# EAGLE board uc_relais_battery_devel_rev_a_4.3.2014 (EAGLE 6.5.0), part 1 of 2
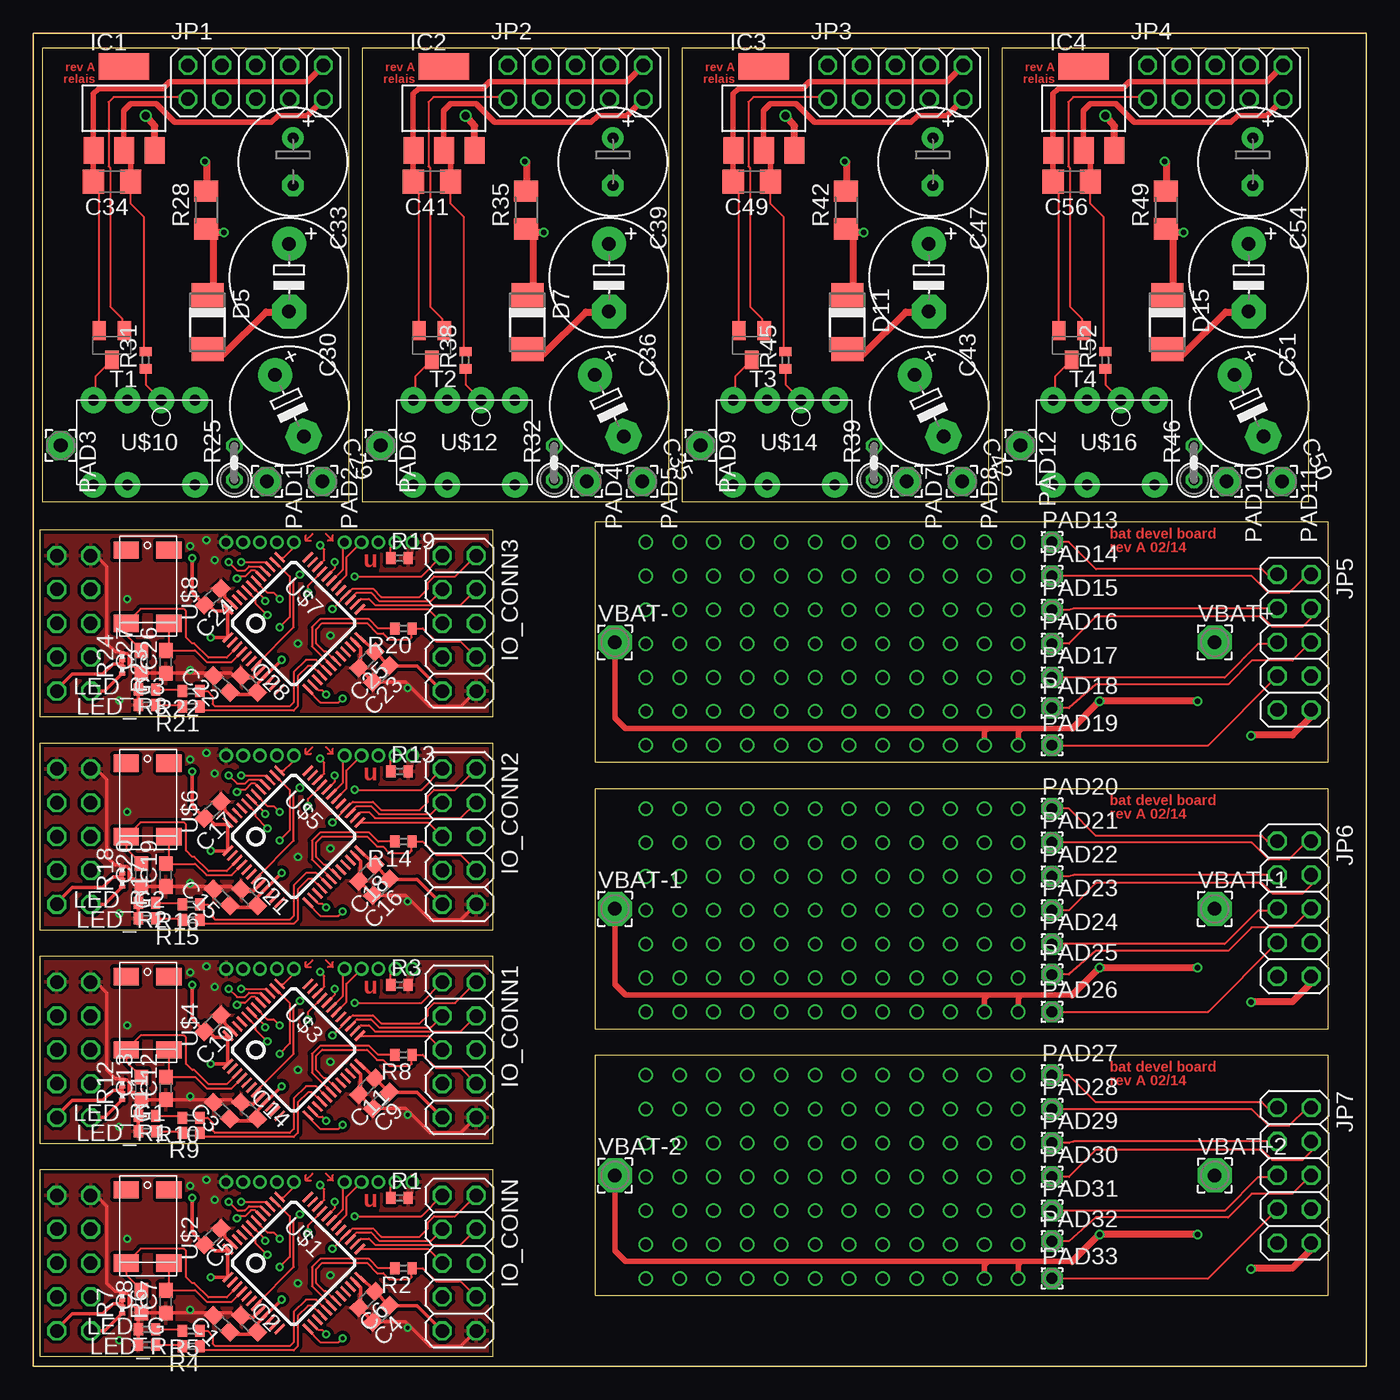
[diagram p0: board, top side]
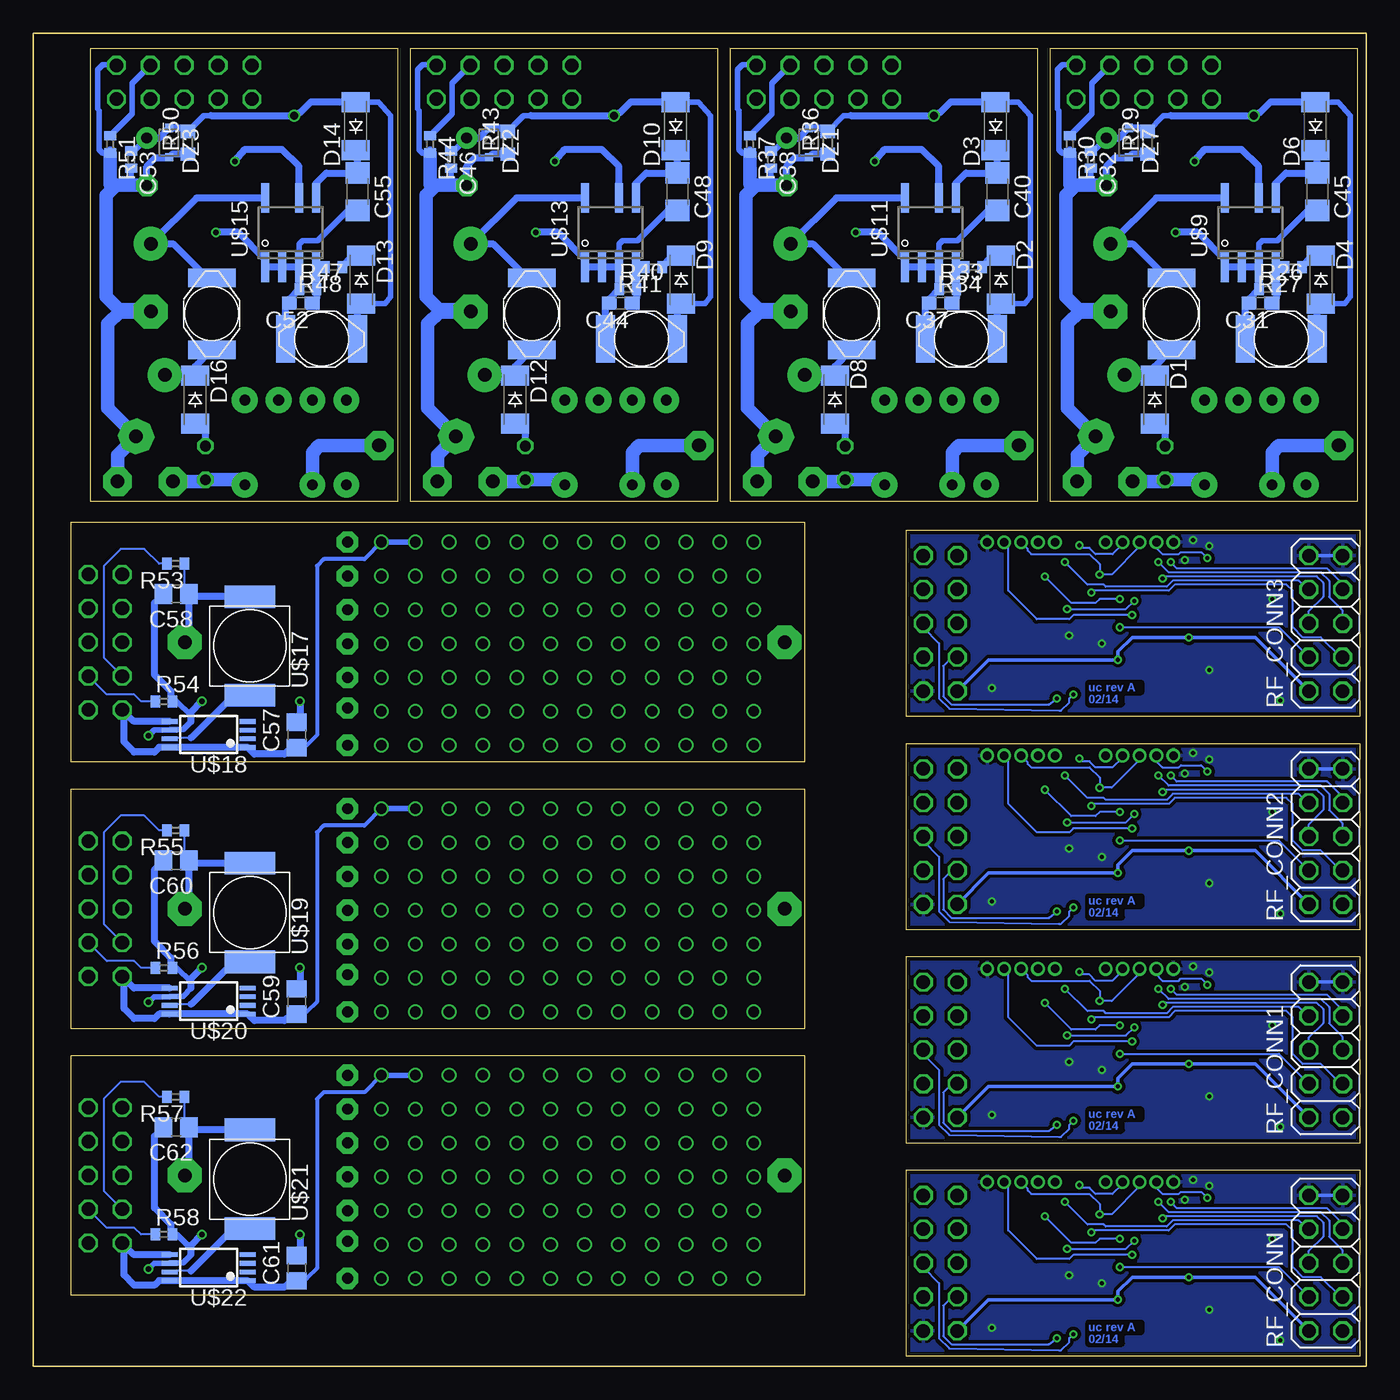
[diagram p1: board, bottom side, seen from below]

Size 100 x 100 mm. Coordinates in mm from the lower left corner, seen from the top.
Outline: 0.49,0.73 34.49,0.73 34.49,14.73 0.49,14.73 0.49,0.73
Outline: 0,0 100,0 100,100 0,100 0,0
Outline: 0.49,16.73 34.49,16.73 34.49,30.73 0.49,30.73 0.49,16.73
Outline: 0.49,32.73 34.49,32.73 34.49,46.73 0.49,46.73 0.49,32.73
Outline: 0.49,48.73 34.49,48.73 34.49,62.73 0.49,62.73 0.49,48.73
Outline: 23.68,64.87 23.68,98.87 0.68,98.87 0.68,64.87 23.68,64.87
Outline: 47.68,64.87 47.68,98.87 24.68,98.87 24.68,64.87 47.68,64.87
Outline: 71.68,64.87 71.68,98.87 48.68,98.87 48.68,64.87 71.68,64.87
Outline: 95.68,64.87 95.68,98.87 72.68,98.87 72.68,64.87 95.68,64.87
Outline: 42.14,45.32 97.14,45.32 97.14,63.32 42.14,63.32 42.14,45.32
Outline: 42.14,25.32 97.14,25.32 97.14,43.32 42.14,43.32 42.14,25.32
Outline: 42.14,5.32 97.14,5.32 97.14,23.32 42.14,23.32 42.14,5.32
Copper layers (1*16): Top 0.035mm / dielectric 1.5mm / Bottom 0.035mm
Design rules "PCB-POOL Standard": minimum track width 0.15mm, minimum drill 0.3mm, track to track 0.15mm, track to pad 0.15mm, pad to pad 0.15mm, via to via 0.15mm, smd to smd 0.15mm, copper to edge 0.3mm, drill to drill 0.2mm, minimum pad ring 0.2mm, minimum via ring 0.15mm, stop-mask expansion 0.075mm, vias tented up to drill 0mil, thermal gap 0.2mm

## Footprints (pad centres in the part's own frame; a part is rotated, then mirrored left to right if it is on the bottom)
C0603 = smd 1.1 x 1: 1 -0.85,0; 2 0.85,0
E5-8,5 = drill 1.016 pad 2.54: + -2.54,0 | drill 1.016 pad 2.54 octagon: - 2.54,0
C0402 = smd 0.7 x 0.9: 1 -0.65,0; 2 0.65,0
E3,5-8 = drill 0.813 pad 1.6: + -1.778,0 | drill 0.813 pad 1.6 octagon: - 1.778,0
C1206 = smd 1.6 x 1.8: 1 -1.4,0; 2 1.4,0
C0805 = smd 1.3 x 1.5: 1 -0.95,0; 2 0.95,0
SOD-123_MINI-SMA = smd 1.5 x 2.1: A 1.8,0; C -1.8,0
DO-214AC = smd 1.8 x 2.4: A 2.025,0; C -2.025,0
05HEADER = drill 0.635 pad 0.762: P$1 -2.54,0; P$2 -1.27,0; P$3 0,0; P$4 1.27,0; P$5 2.54,0
SOD323-R = smd 0.6 x 0.6: A 1.1,0; C -1.1,0
SOT223 = smd 1.499 x 2.007: 1 -2.261,-3.15; 2 0.025,-3.15; 3 2.311,-3.15 | smd 3.81 x 2.007: 4 0,3.15
2X05 = drill 1.016 octagon: 1 -5.08,-1.27; 2 -5.08,1.27; 3 -2.54,-1.27; 4 -2.54,1.27; 5 0,-1.27; 6 0,1.27; 7 2.54,-1.27; 8 2.54,1.27; 9 5.08,-1.27; 10 5.08,1.27
INDUCTOR = smd 1.4 x 3.56: P$1 -2.7,0; P$2 2.7,0
R0402 = smd 0.7 x 0.9: 1 -0.65,0; 2 0.65,0
2,15/1,0 = drill 1.016 pad 2.159 octagon: 1 0,0
1,6/0,8 = drill 0.813 pad 1.6 octagon: 1 0,0
R0201 = smd 0.28 x 0.43: 1 -0.255,0; 2 0.255,0
0207/2V = drill 0.813 octagon: 1 -1.27,0; 2 1.27,0
R1206 = smd 1.6 x 1.803: 1 -1.422,0; 2 1.422,0
R0603 = smd 1 x 1.1: 1 -0.85,0; 2 0.85,0
SOT23-BEC = smd 1 x 1.4: B -0.95,-1.1; C 0,1.1; E 0.95,-1.1
LQFP48 = smd 0.2 x 1: 1 -2.75,-4.25; 2 -2.25,-4.25; 3 -1.75,-4.25; 4 -1.25,-4.25; 5 -0.75,-4.25; 6 -0.25,-4.25; 7 0.25,-4.25; 8 0.75,-4.25; 9 1.25,-4.25; 10 1.75,-4.25; 11 2.25,-4.25; 12 2.75,-4.25; 25 2.75,4.25; 26 2.25,4.25; 27 1.75,4.25; 28 1.25,4.25; 29 0.75,4.25; 30 0.25,4.25; 31 -0.25,4.25; 32 -0.75,4.25; 33 -1.25,4.25; 34 -1.75,4.25; 35 -2.25,4.25; 36 -2.75,4.25 | smd 1 x 0.2: 13 4.25,-2.75; 14 4.25,-2.25; 15 4.25,-1.75; 16 4.25,-1.25; 17 4.25,-0.75; 18 4.25,-0.25; 19 4.25,0.25; 20 4.25,0.75; 21 4.25,1.25; 22 4.25,1.75; 23 4.25,2.25; 24 4.25,2.75; 37 -4.25,2.75; 38 -4.25,2.25; 39 -4.25,1.75; 40 -4.25,1.25; 41 -4.25,0.75; 42 -4.25,0.25; 43 -4.25,-0.25; 44 -4.25,-0.75; 45 -4.25,-1.25; 46 -4.25,-1.75; 47 -4.25,-2.25; 48 -4.25,-2.75
SOJ4 = smd 1.3 x 1.9: P$1 -2.75,-1.6; P$2 2.75,-1.6; P$3 2.75,1.6; P$4 -2.75,1.6
SO7 = smd 0.6 x 2.2: 1 -2.375,-2.56; 2 -1.105,-2.56; 3 0.165,-2.56; 4 1.435,-2.56; 5 1.435,2.64; 6 0.165,2.64; 7 -2.375,2.64
DIP7 = drill 0.8 pad 1.93: P$1 -5.08,-2.54; P$2 -2.54,-2.54; P$3 0,-2.54; P$4 2.54,-2.54; P$5 2.54,3.81; P$6 0,3.81; P$7 -5.08,3.81
ELL6_INDUCTOR = smd 1.7 x 3.8: P$1 -3.7,0; P$2 3.7,0
TSSOP8 = smd 1.2 x 0.35: 1 -2.925,0.975; 2 -2.925,0.325; 3 -2.925,-0.325; 4 -2.925,-0.975; 5 2.925,-0.975; 6 2.925,-0.325; 7 2.925,0.325; 8 2.925,0.975
2,54/1,0 = drill 1.016 pad 2.54 octagon: 1 0,0

## Placement (x,y rotation side)
C1  4u7  [C0603]  14.13,3.17 135 top
C2  100n  [C0603]  16.19,3.17 315 top
C3  4u7  [C0603]  14.13,19.17 135 top
C4  4u7  [C0603]  26.1,3.93 225 top
C5  100n  [C0603]  13.45,9.72 225 top
C6  100n  [C0603]  25.03,5 225 top
C7  7p  [C0603]  9.94,4.85 90 top
C8  7p  [C0603]  8.11,4.85 90 top
C9  4u7  [C0603]  26.1,19.93 225 top
C10  100n  [C0603]  13.45,25.72 225 top
C11  100n  [C0603]  25.03,21 225 top
C12  7p  [C0603]  9.94,20.85 90 top
C13  7p  [C0603]  8.11,20.85 90 top
C14  100n  [C0603]  16.19,19.17 315 top
C15  4u7  [C0603]  14.13,35.17 135 top
C16  4u7  [C0603]  26.1,35.93 225 top
C17  100n  [C0603]  13.45,41.72 225 top
C18  100n  [C0603]  25.03,37 225 top
C19  7p  [C0603]  9.94,36.85 90 top
C20  7p  [C0603]  8.11,36.85 90 top
C21  100n  [C0603]  16.19,35.17 315 top
C22  4u7  [C0603]  14.13,51.17 135 top
C23  4u7  [C0603]  26.1,51.93 225 top
C24  100n  [C0603]  13.45,57.72 225 top
C25  100n  [C0603]  25.03,53 225 top
C26  7p  [C0603]  9.94,52.85 90 top
C27  7p  [C0603]  8.11,52.85 90 top
C28  100n  [C0603]  16.19,51.17 315 top
C29  [E5-8,5]  19.21,72.06 295 top
C30  [E5-8,5]  19.18,81.67 270 top
C31  [C0603]  7.93,79.75 180 bottom
C32  [C0402]  20.65,90.54 270 bottom
C33  [E3,5-8]  19.48,90.37 270 top
C34  2.2u  [C1206]  5.9,88.87 180 top
C35  [E5-8,5]  43.21,72.06 295 top
C36  [E5-8,5]  43.18,81.67 270 top
C37  [C0603]  31.93,79.75 180 bottom
C38  [C0402]  44.65,90.54 270 bottom
C39  [E3,5-8]  43.48,90.37 270 top
C40  2.2u  [C1206]  27.66,88.12 270 bottom
C41  2.2u  [C1206]  29.9,88.87 180 top
C42  [E5-8,5]  67.21,72.06 295 top
C43  [E5-8,5]  67.18,81.67 270 top
C44  [C0603]  55.93,79.75 180 bottom
C45  2.2u  [C1206]  3.66,88.12 270 bottom
C46  [C0402]  68.65,90.54 270 bottom
C47  [E3,5-8]  67.48,90.37 270 top
C48  2.2u  [C1206]  51.66,88.12 270 bottom
C49  2.2u  [C1206]  53.9,88.87 180 top
C50  [E5-8,5]  91.21,72.06 295 top
C51  [E5-8,5]  91.18,81.67 270 top
C52  [C0603]  79.93,79.75 180 bottom
C53  [C0402]  92.65,90.54 270 bottom
C54  [E3,5-8]  91.48,90.37 270 top
C55  2.2u  [C1206]  75.66,88.12 270 bottom
C56  2.2u  [C1206]  77.9,88.87 180 top
C57  22u  [C0805]  80.23,47.36 90 bottom
C58  22u  [C0805]  89.28,57.94 180 bottom
C59  22u  [C0805]  80.23,27.36 90 bottom
C60  22u  [C0805]  89.28,37.94 180 bottom
C61  22u  [C0805]  80.23,7.36 90 bottom
C62  22u  [C0805]  89.28,17.94 180 bottom
D1  CGRM4001-G  [SOD-123_MINI-SMA]  15.86,72.52 270 bottom
D2  CGRM4001-G  [SOD-123_MINI-SMA]  27.39,81.5 270 bottom
D3  CGRM4001-G  [SOD-123_MINI-SMA]  27.81,93.03 90 bottom
D4  CGRM4001-G  [SOD-123_MINI-SMA]  3.39,81.5 270 bottom
D5  [DO-214AC]  13.06,78.32 270 top
D6  CGRM4001-G  [SOD-123_MINI-SMA]  3.81,93.03 90 bottom
D7  [DO-214AC]  37.06,78.32 270 top
D8  CGRM4001-G  [SOD-123_MINI-SMA]  39.86,72.52 270 bottom
D9  CGRM4001-G  [SOD-123_MINI-SMA]  51.39,81.5 270 bottom
D10  CGRM4001-G  [SOD-123_MINI-SMA]  51.81,93.03 90 bottom
D11  [DO-214AC]  61.06,78.32 270 top
D12  CGRM4001-G  [SOD-123_MINI-SMA]  63.86,72.52 270 bottom
D13  CGRM4001-G  [SOD-123_MINI-SMA]  75.39,81.5 270 bottom
D14  CGRM4001-G  [SOD-123_MINI-SMA]  75.81,93.03 90 bottom
D15  [DO-214AC]  85.06,78.32 270 top
D16  CGRM4001-G  [SOD-123_MINI-SMA]  87.86,72.52 270 bottom
DBG  [05HEADER]  17,13.81 180 top
DBG1  [05HEADER]  17,29.81 180 top
DBG2  [05HEADER]  17,45.81 180 top
DBG3  [05HEADER]  17,61.81 180 top
DZ1  [SOD323-R]  41.82,91.8 270 bottom
DZ2  [SOD323-R]  65.82,91.8 270 bottom
DZ3  [SOD323-R]  89.82,91.8 270 bottom
DZ7  [SOD323-R]  17.82,91.8 270 bottom
IC1  REG1117  [SOT223]  6.8,94.37 0 top
IC2  REG1117  [SOT223]  30.8,94.37 0 top
IC3  REG1117  [SOT223]  54.8,94.37 0 top
IC4  REG1117  [SOT223]  78.8,94.37 0 top
IO_CONN  [2X05]  31.95,7.73 270 top
IO_CONN1  [2X05]  31.95,23.73 270 top
IO_CONN2  [2X05]  31.95,39.73 270 top
IO_CONN3  [2X05]  31.95,55.73 270 top
JP1  [2X05]  16.68,96.33 0 top
JP2  [2X05]  40.68,96.33 0 top
JP3  [2X05]  64.68,96.33 0 top
JP4  [2X05]  88.68,96.33 0 top
JP5  [2X05]  94.6,54.32 270 top
JP6  [2X05]  94.6,34.32 270 top
JP7  [2X05]  94.6,14.32 270 top
L1  INDUCTOR  [INDUCTOR]  14.61,78.96 90 bottom
L2  INDUCTOR  [INDUCTOR]  6.37,77.06 180 bottom
L3  INDUCTOR  [INDUCTOR]  38.61,78.96 90 bottom
L4  INDUCTOR  [INDUCTOR]  30.37,77.06 180 bottom
L5  INDUCTOR  [INDUCTOR]  62.61,78.96 90 bottom
L6  INDUCTOR  [INDUCTOR]  54.37,77.06 180 bottom
L7  INDUCTOR  [INDUCTOR]  86.61,78.96 90 bottom
L8  INDUCTOR  [INDUCTOR]  78.37,77.06 180 bottom
LED_G  [R0402]  8.53,1.6 180 top
LED_G1  [R0402]  8.53,17.6 180 top
LED_G2  [R0402]  8.53,33.6 180 top
LED_G3  [R0402]  8.53,49.6 180 top
LED_R  [R0402]  8.53,2.77 180 top
LED_R1  [R0402]  8.53,18.77 180 top
LED_R2  [R0402]  8.53,34.77 180 top
LED_R3  [R0402]  8.53,50.77 180 top
PAD1  [2,15/1,0]  17.53,66.37 270 top
PAD2  [2,15/1,0]  21.68,66.37 270 top
PAD3  [2,15/1,0]  2.06,69.07 270 top
PAD4  [2,15/1,0]  41.53,66.37 270 top
PAD5  [2,15/1,0]  45.68,66.37 270 top
PAD6  [2,15/1,0]  26.06,69.07 270 top
PAD7  [2,15/1,0]  65.53,66.37 270 top
PAD8  [2,15/1,0]  69.68,66.37 270 top
PAD9  [2,15/1,0]  50.06,69.07 270 top
PAD10  [2,15/1,0]  89.53,66.37 270 top
PAD11  [2,15/1,0]  93.68,66.37 270 top
PAD12  [2,15/1,0]  74.06,69.07 270 top
PAD13  [1,6/0,8]  76.43,61.83 0 top
PAD14  [1,6/0,8]  76.43,59.29 0 top
PAD15  [1,6/0,8]  76.43,56.75 0 top
PAD16  [1,6/0,8]  76.43,54.21 0 top
PAD17  [1,6/0,8]  76.43,51.67 0 top
PAD18  [1,6/0,8]  76.43,49.38 0 top
PAD19  [1,6/0,8]  76.43,46.59 0 top
PAD20  [1,6/0,8]  76.43,41.83 0 top
PAD21  [1,6/0,8]  76.43,39.29 0 top
PAD22  [1,6/0,8]  76.43,36.75 0 top
PAD23  [1,6/0,8]  76.43,34.21 0 top
PAD24  [1,6/0,8]  76.43,31.67 0 top
PAD25  [1,6/0,8]  76.43,29.38 0 top
PAD26  [1,6/0,8]  76.43,26.59 0 top
PAD27  [1,6/0,8]  76.43,21.83 0 top
PAD28  [1,6/0,8]  76.43,19.29 0 top
PAD29  [1,6/0,8]  76.43,16.75 0 top
PAD30  [1,6/0,8]  76.43,14.21 0 top
PAD31  [1,6/0,8]  76.43,11.67 0 top
PAD32  [1,6/0,8]  76.43,9.38 0 top
PAD33  [1,6/0,8]  76.43,6.59 0 top
R1  10k  [R0402]  27.47,12.62 0 top
R2  1M  [R0402]  27.77,7.36 180 top
R3  10k  [R0402]  27.47,28.62 0 top
R4  1k  [R0402]  11.85,1.49 180 top
R5  1k  [R0402]  11.85,2.64 180 top
R6  0R/NA  [R0201]  6.66,5.23 270 top
R7  0R/NA  [R0201]  6.66,4.23 90 top
R8  1M  [R0402]  27.77,23.36 180 top
R9  1k  [R0402]  11.85,17.49 180 top
R10  1k  [R0402]  11.85,18.64 180 top
R11  0R/NA  [R0201]  6.66,21.23 270 top
R12  0R/NA  [R0201]  6.66,20.23 90 top
R13  10k  [R0402]  27.47,44.62 0 top
R14  1M  [R0402]  27.77,39.36 180 top
R15  1k  [R0402]  11.85,33.49 180 top
R16  1k  [R0402]  11.85,34.64 180 top
R17  0R/NA  [R0201]  6.66,37.23 270 top
R18  0R/NA  [R0201]  6.66,36.23 90 top
R19  10k  [R0402]  27.47,60.62 0 top
R20  1M  [R0402]  27.77,55.36 180 top
R21  1k  [R0402]  11.85,49.49 180 top
R22  1k  [R0402]  11.85,50.64 180 top
R23  0R/NA  [R0201]  6.66,53.23 270 top
R24  0R/NA  [R0201]  6.66,52.23 90 top
R25  [0207/2V]  15.08,67.77 90 top
R26  [R0402]  7.39,80.8 0 bottom
R27  [R0402]  5.46,82.45 180 bottom
R28  [R1206]  12.98,86.74 90 top
R29  [R0603]  16.4,91.78 90 bottom
R30  1M  [R0402]  22.24,91.67 270 bottom
R31  100  [R0402]  8.41,75.47 90 top
R32  [0207/2V]  39.08,67.77 90 top
R33  [R0402]  31.39,80.8 0 bottom
R34  [R0402]  29.46,82.45 180 bottom
R35  [R1206]  36.98,86.74 90 top
R36  [R0603]  40.4,91.78 90 bottom
R37  1M  [R0402]  46.24,91.67 270 bottom
R38  100  [R0402]  32.41,75.47 90 top
R39  [0207/2V]  63.08,67.77 90 top
R40  [R0402]  55.4,80.8 0 bottom
R41  [R0402]  53.46,82.45 180 bottom
R42  [R1206]  60.98,86.74 90 top
R43  [R0603]  64.4,91.78 90 bottom
R44  1M  [R0402]  70.24,91.67 270 bottom
R45  100  [R0402]  56.41,75.47 90 top
R46  [0207/2V]  87.08,67.77 90 top
R47  [R0402]  79.39,80.8 0 bottom
R48  [R0402]  77.46,82.45 180 bottom
R49  [R1206]  84.98,86.74 90 top
R50  [R0603]  88.4,91.78 90 bottom
R51  1M  [R0402]  94.24,91.67 270 bottom
R52  100  [R0402]  80.41,75.47 90 top
R53  0  [R0402]  89.32,60.21 180 bottom
R54  1M  [R0402]  90.2,49.89 0 bottom
R55  0  [R0402]  89.32,40.21 180 bottom
R56  1M  [R0402]  90.2,29.89 0 bottom
R57  0  [R0402]  89.32,20.21 180 bottom
R58  1M  [R0402]  90.2,9.89 0 bottom
RF_CONN  [2X05]  3.03,7.73 90 bottom
RF_CONN1  [2X05]  3.03,23.73 90 bottom
RF_CONN2  [2X05]  3.03,39.73 90 bottom
RF_CONN3  [2X05]  3.03,55.73 90 bottom
T1  MMUN2233  [SOT23-BEC]  5.9,76.6 180 top
T2  MMUN2233  [SOT23-BEC]  29.9,76.6 180 top
T3  MMUN2233  [SOT23-BEC]  53.9,76.6 180 top
T4  MMUN2233  [SOT23-BEC]  77.9,76.6 180 top
U$1  STM32F051  [LQFP48]  19.54,7.73 315 top
U$2  CRYSTAL_32K  [SOJ4]  8.57,10.49 90 top
U$3  STM32F051  [LQFP48]  19.54,23.73 315 top
U$4  CRYSTAL_32K  [SOJ4]  8.57,26.49 90 top
U$5  STM32F051  [LQFP48]  19.54,39.73 315 top
U$6  CRYSTAL_32K  [SOJ4]  8.57,42.49 90 top
U$7  STM32F051  [LQFP48]  19.54,55.73 315 top
U$8  CRYSTAL_32K  [SOJ4]  8.57,58.49 90 top
U$9  TEA1721  [SO7]  8.23,85.01 0 bottom
U$10  PR3BMF51  [DIP7]  7.06,69.94 180 top
U$11  TEA1721  [SO7]  32.23,85.01 0 bottom
U$12  PR3BMF51  [DIP7]  31.06,69.94 180 top
U$13  TEA1721  [SO7]  56.23,85.01 0 bottom
U$14  PR3BMF51  [DIP7]  55.06,69.94 180 top
U$15  TEA1721  [SO7]  80.23,85.01 0 bottom
U$16  PR3BMF51  [DIP7]  79.06,69.94 180 top
U$17  ELL_INDUCTOR  [ELL6_INDUCTOR]  83.76,54.04 90 bottom
U$18  L6920  [TSSOP8]  86.85,47.4 180 bottom
U$19  ELL_INDUCTOR  [ELL6_INDUCTOR]  83.76,34.04 90 bottom
U$20  L6920  [TSSOP8]  86.85,27.4 180 bottom
U$21  ELL_INDUCTOR  [ELL6_INDUCTOR]  83.76,14.04 90 bottom
U$22  L6920  [TSSOP8]  86.85,7.4 180 bottom
UART  [05HEADER]  25.89,13.81 0 top
UART1  [05HEADER]  25.89,29.81 0 top
UART2  [05HEADER]  25.89,45.81 0 top
UART3  [05HEADER]  25.89,61.81 0 top
VBAT+  [2,54/1,0]  88.64,54.32 0 top
VBAT+1  [2,54/1,0]  88.64,34.32 0 top
VBAT+2  [2,54/1,0]  88.64,14.32 0 top
VBAT-  [2,54/1,0]  43.64,54.32 0 top
VBAT-1  [2,54/1,0]  43.64,34.32 0 top
VBAT-2  [2,54/1,0]  43.64,14.32 0 top

## Library data of the parts
C1 C3 C4 C9 C15 C16 C22 C23 = rcl; DIGIKEY: 1276-2087-1-ND
C2 C5 C6 C10 C11 C14 C17 C18 C21 C24 C25 C28 = rcl; DIGIKEY: 445-4711-1-ND
C7 C8 C12 C13 C19 C20 C26 C27 = rcl; DIGIKEY: 1276-2136-1-ND
C29 C30 C35 C36 C42 C43 C50 C51 = rcl; DIGIKEY: 1189-1633-1-ND
C31 C37 C44 C52 = rcl; DIGIKEY: 399-8979-1-ND
C32 C38 C46 C53 = rcl; DIGIKEY: 1276-1028-1-ND
C33 C39 C47 C54 = rcl; DIGIKEY: 493-1043-ND
C34 C40 C41 C45 C48 C49 C55 C56 = rcl; DIGIKEY: 1276-2723-1-ND
C57-C62 = rcl; DIGIKEY: 1276-1100-1-ND
D1 D8 D12 D16 = diode; REICHELT: S 1ML SMD
D2-D4 D6 D9 D10 D13 D14 = diode; REICHELT: ES 1JL SMD
D5 D7 D11 D15 = diode; DIGIKEY: BYG20J-E3/TRGICT-ND
DBG DBG1-DBG3 UART UART1-UART3 = viskos
DZ1-DZ3 DZ7 = diode; DIGIKEY: 568-3810-1-ND
IC1-IC4 = burr-brown; DIGIKEY: AP1117IE33G-13DICT-ND; MPN: REG1117; OC_FARNELL: 1097566; OC_NEWARK: 14P6981
IO_CONN IO_CONN1-IO_CONN3 = pinhead; DIGIKEY: 609-3243-ND
JP1-JP7 RF_CONN RF_CONN1-RF_CONN3 = pinhead; DIGIKEY: S6105-ND
L1 L3 L5 L7 = fastron_pisg_inductors; REICHELT: L-PISG 1,0M
L2 L4 L6 L8 = fastron_pisg_inductors; REICHELT: L-PISR 1,0M
LED_G LED_G1-LED_G3 = rcl; DIGIKEY: 754-1101-1-ND
LED_R LED_R1-LED_R3 = rcl; DIGIKEY: 754-1104-1-ND
PAD1-PAD33 VBAT+ VBAT+1 VBAT+2 VBAT- VBAT-1 VBAT-2 = wirepad
R1 R3 R13 R19 = rcl; DIGIKEY: 1276-5086-1-ND
R2 R8 R14 R20 R30 R37 R44 R51 R54 R56 R58 = rcl; DIGIKEY: 311-1.00MLRCT-ND
R4 R5 R9 R10 R15 R16 R21 R22 = rcl; DIGIKEY: 1276-5062-1-ND
R6 R7 R11 R12 R17 R18 R23 R24 = rcl
R25 R32 R39 R46 = rcl; DIGIKEY: CF14JT47R0CT-ND
R26 R33 R40 R47 = rcl; DIGIKEY: 1276-3466-1-ND
R27 R34 R41 R48 = rcl; DIGIKEY: RHM18KCDCT-ND
R28 R35 R42 R49 = rcl; DIGIKEY: 311-1.0ERCT-ND
R29 R36 R43 R50 = rcl; DIGIKEY: 311-68KGRCT-ND
R31 R38 R45 R52 = rcl; DIGIKEY: 311-100JRCT-ND
R53 R55 R57 = rcl; DIGIKEY: 311-0.0JRCT-ND
T1-T4 = transistor; DIGIKEY: MMUN2233LT1GOSCT-ND
U$1 U$3 U$5 U$7 = stm32f051; DIGIKEY: 497-12893-ND
U$2 U$4 U$6 U$8 = crystal_32k; DIGIKEY: 370-1056-1-ND
U$9 U$11 U$13 U$15 = tea1721; DIGIKEY: 568-9556-1-ND
U$10 U$12 U$14 U$16 = pr3bmf51_relais; DIGIKEY: 425-2562-5-ND
U$17 U$19 U$21 = ell_inductor; DIGIKEY: PCD1345CT-ND
U$18 U$20 U$22 = l6920_step_up; DIGIKEY: L6920D-ND

## Nets
+3V1: C3.1 C9.1 C10.2 C11.1 C14.2 DBG1.P$4 IO_CONN1.9 R12.1 RF_CONN1.2 U$3.1 U$3.9 U$3.24 U$3.48
+3V2: C15.1 C16.1 C17.2 C18.1 C21.2 DBG2.P$4 IO_CONN2.9 R18.1 RF_CONN2.2 U$5.1 U$5.9 U$5.24 U$5.48
+3V3: C1.1 C2.2 C4.1 C5.2 C6.1 DBG.P$4 IO_CONN.9 R7.1 RF_CONN.2 U$1.1 U$1.9 U$1.24 U$1.48
+3V4: C22.1 C23.1 C24.2 C25.1 C28.2 DBG3.P$4 IO_CONN3.9 R24.1 RF_CONN3.2 U$7.1 U$7.9 U$7.24 U$7.48
+3V5: C34.1 IC1.2 JP1.9 R31.2
+3V6: C41.1 IC2.2 JP2.9 R38.2
+3V7: C49.1 IC3.2 JP3.9 R45.2
+3V8: C56.1 IC4.2 JP4.9 R52.2
+3V9: C57.1 JP5.9 U$18.1 U$18.5 U$18.8
+3V10: C59.1 JP6.9 U$20.1 U$20.5 U$20.8
+3V11: C61.1 JP7.9 U$22.1 U$22.5 U$22.8
+12V: C32.1 C33.+ D4.A D6.A DZ7.C IC1.3 L2.P$1 R29.2
+12V1: C38.1 C39.+ D2.A D3.A DZ1.C IC2.3 L4.P$1 R36.2
+12V2: C46.1 C47.+ D9.A D10.A DZ2.C IC3.3 L6.P$1 R43.2
+12V3: C53.1 C54.+ D13.A D14.A DZ3.C IC4.3 L8.P$1 R50.2
GND: C1.2 C2.1 C4.2 C5.1 C6.2 C7.1 C8.1 DBG.P$5 IO_CONN.10 LED_G.2 LED_R.2 R1.2 R6.1 RF_CONN.9 RF_CONN.10 U$1.8 U$1.23 U$1.47 UART.P$5
GND1: C3.2 C9.2 C10.1 C11.2 C12.1 C13.1 C14.1 DBG1.P$5 IO_CONN1.10 LED_G1.2 LED_R1.2 R3.2 R11.1 RF_CONN1.9 RF_CONN1.10 U$3.8 U$3.23 U$3.47 UART1.P$5
GND2: C15.2 C16.2 C17.1 C18.2 C19.1 C20.1 C21.1 DBG2.P$5 IO_CONN2.10 LED_G2.2 LED_R2.2 R13.2 R17.1 RF_CONN2.9 RF_CONN2.10 U$5.8 U$5.23 U$5.47 UART2.P$5
GND3: C22.2 C23.2 C24.1 C25.2 C26.1 C27.1 C28.1 DBG3.P$5 IO_CONN3.10 LED_G3.2 LED_R3.2 R19.2 R23.1 RF_CONN3.9 RF_CONN3.10 U$7.8 U$7.23 U$7.47 UART3.P$5
GND4: C57.2 C58.2 JP5.10 R54.2 U$18.6 VBAT-.1
GND5: C59.2 C60.2 JP6.10 R56.2 U$20.6 VBAT-1.1
GND6: C61.2 C62.2 JP7.10 R58.2 U$22.6 VBAT-2.1
IO_0: IO_CONN.1 U$1.42
IO_1: IO_CONN.2 U$1.28 U$1.43
IO_2: IO_CONN.3 U$1.27
IO_3: IO_CONN.4 U$1.26
IO_4: IO_CONN.5 U$1.25
IO_5: IO_CONN.6 U$1.14
IO_6: IO_CONN.7 U$1.13
IO_7: IO_CONN1.7 U$3.13
IO_8: IO_CONN1.6 U$3.14
IO_9: IO_CONN1.1 U$3.42
IO_10: IO_CONN1.5 U$3.25
IO_11: IO_CONN1.4 U$3.26
IO_12: IO_CONN1.3 U$3.27
IO_13: IO_CONN1.2 U$3.28 U$3.43
IO_14: IO_CONN2.7 U$5.13
IO_15: IO_CONN2.6 U$5.14
IO_16: IO_CONN2.1 U$5.42
IO_17: IO_CONN2.5 U$5.25
IO_18: IO_CONN2.4 U$5.26
IO_19: IO_CONN2.3 U$5.27
IO_20: IO_CONN2.2 U$5.28 U$5.43
IO_21: IO_CONN3.7 U$7.13
IO_22: IO_CONN3.6 U$7.14
IO_23: IO_CONN3.1 U$7.42
IO_24: IO_CONN3.5 U$7.25
IO_25: IO_CONN3.4 U$7.26
IO_26: IO_CONN3.3 U$7.27
IO_27: IO_CONN3.2 U$7.28 U$7.43
IO_28: JP1.1 T1.B
IO_29: JP2.1 T2.B
IO_30: JP3.1 T3.B
IO_31: JP4.1 T4.B
IO_32: JP5.1 PAD13.1
IO_33: JP5.3 PAD15.1
IO_34: JP5.5 PAD17.1
IO_35: JP5.7 PAD19.1 R53.2
IO_36: JP5.2 PAD14.1
IO_37: JP5.4 PAD16.1
IO_38: JP5.6 PAD18.1
IO_39: JP6.1 PAD20.1
IO_40: JP6.3 PAD22.1
IO_41: JP6.5 PAD24.1
IO_42: JP6.7 PAD26.1 R55.2
IO_43: JP6.2 PAD21.1
IO_44: JP6.4 PAD23.1
IO_45: JP6.6 PAD25.1
IO_46: JP7.1 PAD27.1
IO_47: JP7.3 PAD29.1
IO_48: JP7.5 PAD31.1
IO_49: JP7.7 PAD33.1 R57.2
IO_50: JP7.2 PAD28.1
IO_51: JP7.4 PAD30.1
IO_52: JP7.6 PAD32.1
IO_ID: IO_CONN.8 R2.1 U$1.19
IO_ID1: IO_CONN1.8 R8.1 U$3.19
IO_ID2: IO_CONN2.8 R14.1 U$5.19
IO_ID3: IO_CONN3.8 R20.1 U$7.19
IO_ID4: JP1.8 R30.1
IO_ID5: JP2.8 R37.1
IO_ID6: JP3.8 R44.1
IO_ID7: JP4.8 R51.1
IO_ID8: JP5.8 R54.1
IO_ID9: JP6.8 R56.1
IO_ID10: JP7.8 R58.1
IO_ID_ENABLE: R2.2 U$1.18
IO_ID_ENABLE1: R8.2 U$3.18
IO_ID_ENABLE2: R14.2 U$5.18
IO_ID_ENABLE3: R20.2 U$7.18
ISP_ENABLE: R1.1 U$1.44 UART.P$4
ISP_ENABLE1: R3.1 U$3.44 UART1.P$4
ISP_ENABLE2: R13.1 U$5.44 UART2.P$4
ISP_ENABLE3: R19.1 U$7.44 UART3.P$4
LED_G: R4.1 U$1.16
LED_G1: R9.1 U$3.16
LED_G2: R15.1 U$5.16
LED_G3: R21.1 U$7.16
LED_R: R5.1 U$1.17
LED_R1: R10.1 U$3.17
LED_R2: R16.1 U$5.17
LED_R3: R22.1 U$7.17
LIVE: PAD1.1 R25.1 U$10.P$7
LIVE1: PAD4.1 R32.1 U$12.P$7
LIVE2: PAD7.1 R39.1 U$14.P$7
LIVE3: PAD10.1 R46.1 U$16.P$7
N$1: LED_R.1 R5.2
N$2: LED_G.1 R4.2
N$3: C8.2 U$1.3 U$2.P$4
N$4: R6.2 R7.2 RF_CONN.1
N$5: C7.2 U$1.4 U$2.P$1
N$8: LED_R1.1 R10.2
N$9: LED_G1.1 R9.2
N$10: R11.2 R12.2 RF_CONN1.1
N$11: C13.2 U$3.3 U$4.P$4
N$12: C12.2 U$3.4 U$4.P$1
N$15: LED_R2.1 R16.2
N$16: LED_G2.1 R15.2
N$17: R17.2 R18.2 RF_CONN2.1
N$18: C20.2 U$5.3 U$6.P$4
N$19: C19.2 U$5.4 U$6.P$1
N$22: LED_R3.1 R22.2
N$23: LED_G3.1 R21.2
N$24: R23.2 R24.2 RF_CONN3.1
N$25: C27.2 U$7.3 U$8.P$4
N$26: C26.2 U$7.4 U$8.P$1
N$29: D1.A R25.2
N$30: C29.+ D1.C L1.P$1
N$31: C30.+ L1.P$2 U$9.7
N$32: C45.1 D6.C U$9.5
N$33: R28.2 U$9.6
N$34: C31.2 C45.2 D5.C L2.P$2 R26.1 R28.1 U$9.1 U$9.2 U$9.3
N$35: D4.C R27.1
N$36: C31.1 R26.2 R27.2 U$9.4
N$37: PAD3.1 U$10.P$6
N$38: R31.1 U$10.P$2
N$39: T1.C U$10.P$3 U$10.P$4
N$40: D8.A R32.2
N$41: C35.+ D8.C L3.P$1
N$42: C36.+ L3.P$2 U$11.7
N$43: C40.1 D3.C U$11.5
N$44: R35.2 U$11.6
N$45: C37.2 C40.2 D7.C L4.P$2 R33.1 R35.1 U$11.1 U$11.2 U$11.3
N$46: D2.C R34.1
N$47: C37.1 R33.2 R34.2 U$11.4
N$48: PAD6.1 U$12.P$6
N$49: R38.1 U$12.P$2
N$50: T2.C U$12.P$3 U$12.P$4
N$51: D12.A R39.2
N$52: C42.+ D12.C L5.P$1
N$53: C43.+ L5.P$2 U$13.7
N$54: C48.1 D10.C U$13.5
N$55: R42.2 U$13.6
N$56: C44.2 C48.2 D11.C L6.P$2 R40.1 R42.1 U$13.1 U$13.2 U$13.3
N$57: D9.C R41.1
N$58: C44.1 R40.2 R41.2 U$13.4
N$59: PAD9.1 U$14.P$6
N$60: R45.1 U$14.P$2
N$61: T3.C U$14.P$3 U$14.P$4
N$62: D16.A R46.2
N$63: C50.+ D16.C L7.P$1
N$64: C51.+ L7.P$2 U$15.7
N$65: C55.1 D14.C U$15.5
N$66: R49.2 U$15.6
N$67: C52.2 C55.2 D15.C L8.P$2 R47.1 R49.1 U$15.1 U$15.2 U$15.3
N$68: D13.C R48.1
N$69: C52.1 R47.2 R48.2 U$15.4
N$70: PAD12.1 U$16.P$6
N$71: R52.1 U$16.P$2
N$72: T4.C U$16.P$3 U$16.P$4
N$73: U$17.P$1 U$18.7
N$154: U$19.P$1 U$20.7
N$235: U$21.P$1 U$22.7
NEUTRAL: C29.- C30.- C32.2 C33.- C34.2 D5.A DZ7.A IC1.1 JP1.10 PAD2.1 R29.1 R30.2 T1.E
NEUTRAL1: C35.- C36.- C38.2 C39.- C41.2 D7.A DZ1.A IC2.1 JP2.10 PAD5.1 R36.1 R37.2 T2.E
NEUTRAL2: C42.- C43.- C46.2 C47.- C49.2 D11.A DZ2.A IC3.1 JP3.10 PAD8.1 R43.1 R44.2 T3.E
NEUTRAL3: C50.- C51.- C53.2 C54.- C56.2 D15.A DZ3.A IC4.1 JP4.10 PAD11.1 R50.1 R51.2 T4.E
RESET: DBG.P$3 U$1.7 UART.P$3
RESET1: DBG1.P$3 U$3.7 UART1.P$3
RESET2: DBG2.P$3 U$5.7 UART2.P$3
RESET3: DBG3.P$3 U$7.7 UART3.P$3
RF_CE: RF_CONN.3 U$1.33
RF_CE1: RF_CONN1.3 U$3.33
RF_CE2: RF_CONN2.3 U$5.33
RF_CE3: RF_CONN3.3 U$7.33
RF_CSN: RF_CONN.4 U$1.38
RF_CSN1: RF_CONN1.4 U$3.38
RF_CSN2: RF_CONN2.4 U$5.38
RF_CSN3: RF_CONN3.4 U$7.38
RF_IRQ: RF_CONN.8 U$1.32
RF_IRQ1: RF_CONN1.8 U$3.32
RF_IRQ2: RF_CONN2.8 U$5.32
RF_IRQ3: RF_CONN3.8 U$7.32
RF_MI: RF_CONN.7 U$1.40
RF_MI1: RF_CONN1.7 U$3.40
RF_MI2: RF_CONN2.7 U$5.40
RF_MI3: RF_CONN3.7 U$7.40
RF_MO: RF_CONN.6 U$1.41
RF_MO1: RF_CONN1.6 U$3.41
RF_MO2: RF_CONN2.6 U$5.41
RF_MO3: RF_CONN3.6 U$7.41
RF_SCK: RF_CONN.5 U$1.39
RF_SCK1: RF_CONN1.5 U$3.39
RF_SCK2: RF_CONN2.5 U$5.39
RF_SCK3: RF_CONN3.5 U$7.39
RXD: U$1.31 UART.P$1
RXD1: U$3.31 UART1.P$1
RXD2: U$5.31 UART2.P$1
RXD3: U$7.31 UART3.P$1
SWCLK: DBG.P$1 U$1.37
SWCLK1: DBG1.P$1 U$3.37
SWCLK2: DBG2.P$1 U$5.37
SWCLK3: DBG3.P$1 U$7.37
SWDIO: DBG.P$2 U$1.34
SWDIO1: DBG1.P$2 U$3.34
SWDIO2: DBG2.P$2 U$5.34
SWDIO3: DBG3.P$2 U$7.34
TXD: U$1.30 UART.P$2
TXD1: U$3.30 UART1.P$2
TXD2: U$5.30 UART2.P$2
TXD3: U$7.30 UART3.P$2
VBAT: C58.1 R53.1 U$17.P$2 VBAT+.1
VBAT1: C60.1 R55.1 U$19.P$2 VBAT+1.1
VBAT2: C62.1 R57.1 U$21.P$2 VBAT+2.1

## Tracks (layer width: path | path; a pad name or v marks a point on that pad's centre or on a via)
+3V1  (via drill 0.3)
  Top 0.152: U$3.24 24.56,22.67 | v13.3,22.67 v13.29,22.68 | U$3.9 17.47,19.84
  Top 0.254: 24.56,22.67 C11.1 C9.1 28.8,20.53 IO_CONN1.9 | RF_CONN1.2 5.34,18.65 R12.1 | v11.92,28.62 11.92,26.05 C10.2 13.13,25.12 13.6,24.66 14.46,24.66 U$3.48 U$3.1 v13.3,22.67 | 17.47,19.84 v18.63,21 | U$3.9 17.42,19.79 16.8,19.17 C14.2 16.63,18.41 15.28,18.41 15.12,18.57 C3.1
  Bottom 0.152: v11.92,28.62 12.38,29.08 13.9,29.08 14.06,28.93 15.28,28.93 15.73,29.38 DBG1.P$4
  Bottom 0.254: RF_CONN1.2 8.33,22.68 v13.29,22.68 17.56,22.68 18.63,21.61 v18.63,21 28.34,21 IO_CONN1.9
+3V2  (via drill 0.3)
  Top 0.152: U$5.24 24.56,38.67 | v13.3,38.67 v13.29,38.68 | U$5.9 17.47,35.84
  Top 0.254: 24.56,38.67 C18.1 C16.1 28.8,36.53 IO_CONN2.9 | RF_CONN2.2 5.34,34.65 R18.1 | v11.92,44.62 11.92,42.05 C17.2 13.13,41.12 13.6,40.66 14.46,40.66 U$5.48 U$5.1 v13.3,38.67 | 17.47,35.84 v18.63,37 | U$5.9 17.42,35.79 16.8,35.17 C21.2 16.63,34.41 15.28,34.41 15.12,34.57 C15.1
  Bottom 0.152: v11.92,44.62 12.38,45.08 13.9,45.08 14.06,44.92 15.28,44.92 15.73,45.38 DBG2.P$4
  Bottom 0.254: RF_CONN2.2 8.33,38.68 v13.29,38.68 17.56,38.68 18.63,37.61 v18.63,37 28.34,37 IO_CONN2.9
+3V3  (via drill 0.3)
  Top 0.152: U$1.24 24.56,6.67 | v13.3,6.67 v13.29,6.68 | U$1.9 17.47,3.84
  Top 0.254: 24.56,6.67 C6.1 C4.1 28.8,4.53 IO_CONN.9 | RF_CONN.2 5.34,2.65 R7.1 | v11.92,12.62 11.92,10.05 C5.2 13.13,9.12 13.6,8.66 14.46,8.66 U$1.48 U$1.1 v13.3,6.67 | 17.47,3.84 v18.63,5 | U$1.9 17.42,3.79 16.8,3.17 C2.2 16.63,2.41 15.28,2.41 15.12,2.57 C1.1
  Bottom 0.152: v11.92,12.62 12.38,13.08 13.9,13.08 14.06,12.93 15.28,12.93 15.73,13.38 DBG.P$4
  Bottom 0.254: RF_CONN.2 8.33,6.68 v13.29,6.68 17.56,6.68 18.63,5.61 v18.63,5 28.34,5 IO_CONN.9
+3V4  (via drill 0.3)
  Top 0.152: U$7.24 24.56,54.67 | v13.3,54.67 v13.29,54.68 | U$7.9 17.47,51.84
  Top 0.254: 24.56,54.67 C25.1 C23.1 28.8,52.53 IO_CONN3.9 | RF_CONN3.2 5.34,50.65 R24.1 | v11.92,60.62 11.92,58.05 C24.2 13.13,57.12 13.6,56.66 14.46,56.66 U$7.48 U$7.1 v13.3,54.67 | 17.47,51.84 v18.63,53 | U$7.9 17.42,51.79 16.8,51.17 C28.2 16.63,50.41 15.28,50.41 15.12,50.57 C22.1
  Bottom 0.152: v11.92,60.62 12.38,61.08 13.9,61.08 14.06,60.92 15.28,60.92 15.73,61.38 DBG3.P$4
  Bottom 0.254: RF_CONN3.2 8.33,54.68 v13.29,54.68 17.56,54.68 18.63,53.61 v18.63,53 28.34,53 IO_CONN3.9
+3V5
  Top 0.152: R31.2 8.32,76.22 8.32,86.21 7.3,87.22 C34.1
  Top 0.406: JP1.9 20.53,93.83 18.35,93.83 17.84,93.32 10.6,93.32 9.21,94.72 7.3,94.72 6.79,94.21 6.79,91.25 IC1.2 7.3,90.74 C34.1
+3V6
  Top 0.152: R38.2 32.32,76.22 32.32,86.21 31.3,87.22 C41.1
  Top 0.406: JP2.9 44.53,93.83 42.35,93.83 41.84,93.32 34.6,93.32 33.21,94.72 31.3,94.72 30.79,94.21 30.79,91.25 IC2.2 31.3,90.74 C41.1
+3V7
  Top 0.152: R45.2 56.32,76.22 56.32,86.21 55.3,87.22 C49.1
  Top 0.406: JP3.9 68.53,93.83 66.35,93.83 65.84,93.32 58.6,93.32 57.21,94.72 55.3,94.72 54.79,94.21 54.79,91.25 IC3.2 55.3,90.74 C49.1
+3V8
  Top 0.152: R52.2 80.32,76.22 80.32,86.21 79.3,87.22 C56.1
  Top 0.406: JP4.9 92.53,93.83 90.35,93.83 89.84,93.32 82.6,93.32 81.21,94.72 79.3,94.72 78.79,94.21 78.79,91.25 IC4.2 79.3,90.74 C56.1
+3V9  (via drill 0.8)
  Bottom 0.305: v73.89,61.83 75.16,60.56 78.21,60.56 78.72,60.05 78.72,47.35 79.48,46.59 80.05,46.59 C57.1
  Bottom 0.406: v73.89,61.83 v71.35,61.83
  Bottom 0.508: C57.1 80.67,46.41 81.15,45.93 83.43,45.93 U$18.1 U$18.8 90.56,46.42 90.91,46.08 92.43,46.08 93.19,46.84 93.19,49.1 JP5.9 92.47,48.37 U$18.5
+3V10  (via drill 0.8)
  Bottom 0.305: v73.89,41.83 75.16,40.56 78.21,40.56 78.72,40.05 78.72,27.35 79.48,26.59 80.05,26.59 C59.1
  Bottom 0.406: v73.89,41.83 v71.35,41.83
  Bottom 0.508: C59.1 80.67,26.41 81.15,25.93 83.43,25.93 U$20.1 U$20.8 90.56,26.42 90.91,26.08 92.43,26.08 93.19,26.84 93.19,29.1 JP6.9 92.47,28.37 U$20.5
+3V11  (via drill 0.8)
  Bottom 0.305: v73.89,21.83 75.16,20.56 78.21,20.56 78.72,20.05 78.72,7.35 79.48,6.59 80.05,6.59 C61.1
  Bottom 0.406: v73.89,21.83 v71.35,21.83
  Bottom 0.508: C61.1 80.67,6.41 81.15,5.93 83.43,5.93 U$22.1 U$22.8 90.56,6.42 90.91,6.08 92.43,6.08 93.19,6.84 93.19,9.1 JP7.9 92.47,8.37 U$22.5
+12V  (via drill 0.6)
  Top 0.508: IC1.3 9.11,93.04 v8.44,93.83
  Bottom 0.254: 4.31,94.84 D6.A
  Bottom 0.406: C32.1 20.32,91.31 C33.+ | 14.67,93.83 15.2,93.83 R29.2 | 3.67,79.7 1.61,79.7 1.21,80.24 1.21,93.83 2.09,94.84 4.31,94.84
  Bottom 0.508: 8.44,93.95 v8.44,93.83 | v8.44,93.83 7.95,94.07 7.18,94.83 D6.A 4.2,94.72 | L2.P$1 3.67,79.7 D4.A | 14.67,93.83 v8.44,93.83 | C33.+ 18.57,92.15 DZ7.C 16.67,92.9 R29.2
+12V1  (via drill 0.6)
  Top 0.508: IC2.3 33.11,93.04 v32.44,93.83
  Bottom 0.254: 28.31,94.84 D3.A
  Bottom 0.406: C38.1 44.32,91.31 C39.+ | 38.67,93.83 39.2,93.83 R36.2 | 27.67,79.7 25.61,79.7 25.2,80.24 25.2,93.83 26.09,94.84 28.31,94.84
  Bottom 0.508: 32.44,93.95 v32.44,93.83 | v32.44,93.83 31.95,94.07 31.18,94.83 D3.A 28.2,94.72 | L4.P$1 27.67,79.7 D2.A | 38.67,93.83 v32.44,93.83 | C39.+ 42.57,92.15 DZ1.C 40.67,92.9 R36.2
+12V2  (via drill 0.6)
  Top 0.508: IC3.3 57.11,93.04 v56.44,93.83
  Bottom 0.254: 52.31,94.84 D10.A
  Bottom 0.406: C46.1 68.32,91.31 C47.+ | 62.67,93.83 63.2,93.83 R43.2 | 51.67,79.7 49.62,79.7 49.2,80.24 49.2,93.83 50.09,94.84 52.31,94.84
  Bottom 0.508: 56.44,93.95 v56.44,93.83 | v56.44,93.83 55.95,94.07 55.18,94.83 D10.A 52.2,94.72 | L6.P$1 51.67,79.7 D9.A | 62.67,93.83 v56.44,93.83 | C47.+ 66.57,92.15 DZ2.C 64.67,92.9 R43.2
+12V3  (via drill 0.6)
  Top 0.508: IC4.3 81.11,93.04 v80.44,93.83
  Bottom 0.254: 76.31,94.84 D14.A
  Bottom 0.406: C53.1 92.32,91.31 C54.+ | 86.67,93.83 87.2,93.83 R50.2 | 75.67,79.7 73.61,79.7 73.2,80.24 73.2,93.83 74.09,94.84 76.31,94.84
  Bottom 0.508: 80.44,93.95 v80.44,93.83 | v80.44,93.83 79.95,94.07 79.18,94.83 D14.A 76.2,94.72 | L8.P$1 75.67,79.7 D13.A | 86.67,93.83 v80.44,93.83 | C54.+ 90.57,92.15 DZ3.C 88.67,92.9 R50.2
GND  (via drill 0.3)
  Top 0.152: U$1.23 24.17,6.32 | 24.57,4.54 C6.2 | U$1.47 | 14.36,10.62 C5.1 | 7.88,3.76 C8.1
  Top 0.254: 24.17,6.32 24.57,5.91 24.57,4.54 | C6.2 C4.2 27.92,3.33 29.75,1.5 32.06,1.5 IO_CONN.10 | U$1.47 14.36,9.72 14.36,10.62 | RF_CONN.10 4.72,12.81 5.52,12.01 5.52,6.22 6.13,5.61 6.54,5.61 R6.1 7.02,5.48 7.2,5.3 7.2,4.54 7.57,4.54 C8.1 C7.1 14.83,4 | LED_G.2 LED_R.2 7.88,3.76 | U$1.8 16.5,3.63 15.73,3.63 C2.1
  Bottom 0.254: RF_CONN.9 RF_CONN.10
  other vias: 12.99,13.99 13.6,12.47 11.77,13.53 28.08,2.87 11.77,4.24 6.44,1.95 7.05,9.57 22.29,6.83 19.85,6.22
  pour Top (isolate 0.254): 0.49,14.91 34.78,14.91 34.78,0.73 0.49,0.73
  pour Bottom (isolate 0.254): 0.49,15.36 35.24,15.36 35.24,0.43 0.49,0.43
GND1  (via drill 0.3)
  Top 0.152: U$3.23 24.17,22.32 | 24.57,20.54 C11.2 | U$3.47 | 14.36,26.62 C10.1 | 7.88,19.76 C13.1
  Top 0.254: 24.17,22.32 24.57,21.91 24.57,20.54 | C11.2 C9.2 27.92,19.33 29.75,17.5 32.06,17.5 IO_CONN1.10 | U$3.47 14.36,25.72 14.36,26.62 | RF_CONN1.10 4.72,28.81 5.52,28.01 5.52,22.22 6.13,21.61 6.54,21.61 R11.1 7.02,21.48 7.2,21.3 7.2,20.54 7.57,20.54 C13.1 C12.1 14.83,20 | LED_G1.2 LED_R1.2 7.88,19.76 | U$3.8 16.5,19.63 15.73,19.63 C14.1
  Bottom 0.254: RF_CONN1.9 RF_CONN1.10
  other vias: 12.99,29.99 13.6,28.47 11.77,29.53 28.08,18.87 11.77,20.24 6.44,17.95 7.05,25.57 22.29,22.83 19.85,22.22
  pour Top (isolate 0.254): 0.49,30.91 34.78,30.91 34.78,16.73 0.49,16.73
  pour Bottom (isolate 0.254): 0.49,31.36 35.24,31.36 35.24,16.43 0.49,16.43
GND2  (via drill 0.3)
  Top 0.152: U$5.23 24.17,38.32 | 24.57,36.54 C18.2 | U$5.47 | 14.36,42.62 C17.1 | 7.88,35.76 C20.1
  Top 0.254: 24.17,38.32 24.57,37.91 24.57,36.54 | C18.2 C16.2 27.92,35.33 29.75,33.49 32.06,33.49 IO_CONN2.10 | U$5.47 14.36,41.72 14.36,42.62 | RF_CONN2.10 4.72,44.81 5.52,44.01 5.52,38.22 6.13,37.61 6.54,37.61 R17.1 7.02,37.48 7.2,37.3 7.2,36.54 7.57,36.54 C20.1 C19.1 14.83,36 | LED_G2.2 LED_R2.2 7.88,35.76 | U$5.8 16.5,35.63 15.73,35.63 C21.1
  Bottom 0.254: RF_CONN2.9 RF_CONN2.10
  other vias: 12.99,45.99 13.6,44.47 11.77,45.53 28.08,34.87 11.77,36.24 6.44,33.95 7.05,41.57 22.29,38.83 19.85,38.22
  pour Top (isolate 0.254): 0.49,46.91 34.78,46.91 34.78,32.73 0.49,32.73
  pour Bottom (isolate 0.254): 0.49,47.36 35.24,47.36 35.24,32.43 0.49,32.43
GND3  (via drill 0.3)
  Top 0.152: U$7.23 24.17,54.32 | 24.57,52.54 C25.2 | U$7.47 | 14.36,58.62 C24.1 | 7.88,51.76 C27.1
  Top 0.254: 24.17,54.32 24.57,53.91 24.57,52.54 | C25.2 C23.2 27.92,51.33 29.75,49.49 32.06,49.49 IO_CONN3.10 | U$7.47 14.36,57.72 14.36,58.62 | RF_CONN3.10 4.72,60.81 5.52,60.01 5.52,54.22 6.13,53.61 6.54,53.61 R23.1 7.02,53.48 7.2,53.3 7.2,52.54 7.57,52.54 C27.1 C26.1 14.83,52 | LED_G3.2 LED_R3.2 7.88,51.76 | U$7.8 16.5,51.63 15.73,51.63 C28.1
  Bottom 0.254: RF_CONN3.9 RF_CONN3.10
  other vias: 12.99,61.99 13.6,60.47 11.77,61.53 28.08,50.87 11.77,52.24 6.44,49.95 7.05,57.57 22.29,54.83 19.85,54.22
  pour Top (isolate 0.254): 0.49,62.91 34.78,62.91 34.78,48.73 0.49,48.73
  pour Bottom (isolate 0.254): 0.49,63.36 35.24,63.36 35.24,48.43 0.49,48.43
GND4  (via drill 0.41, 0.8)
  Top 0.406: VBAT-.1 43.64,48.64 44.43,47.86 71.6,47.86 | 71.6,47.86 74.14,47.86 | 74.14,47.86 77.95,47.86 | v73.89,46.59 73.89,47.6 74.14,47.86 | v71.35,46.59 71.35,47.6 71.6,47.86
  Top 0.508: 77.95,47.86 v79.99,49.89 v87.35,49.89 | JP5.10 95.87,48.75 94.46,47.35 91.42,47.35 v91.36,47.3
  Bottom 0.406: v91.36,47.3 90.94,47.72 U$18.6 89.74,47.75 88.77,47.75 88.17,48.36 88.17,48.82 89.23,49.89 R54.2
  Bottom 0.508: R54.2 89.69,50.02 89.69,50.65 90.91,51.87 90.91,57.26 C58.2 | v79.99,49.89 79.99,48.57 C57.2 | 88.17,48.36 88.17,49.08 v87.35,49.89
GND5  (via drill 0.41, 0.8)
  Top 0.406: VBAT-1.1 43.64,28.64 44.43,27.86 71.6,27.86 | 71.6,27.86 74.14,27.86 | 74.14,27.86 77.95,27.86 | v73.89,26.59 73.89,27.6 74.14,27.86 | v71.35,26.59 71.35,27.6 71.6,27.86
  Top 0.508: 77.95,27.86 v79.99,29.89 v87.35,29.89 | JP6.10 95.87,28.75 94.46,27.35 91.42,27.35 v91.36,27.3
  Bottom 0.406: v91.36,27.3 90.94,27.72 U$20.6 89.74,27.75 88.77,27.75 88.17,28.36 88.17,28.82 89.23,29.89 R56.2
  Bottom 0.508: R56.2 89.69,30.02 89.69,30.65 90.91,31.87 90.91,37.26 C60.2 | v79.99,29.89 79.99,28.57 C59.2 | 88.17,28.36 88.17,29.07 v87.35,29.89
GND6  (via drill 0.41, 0.8)
  Top 0.406: VBAT-2.1 43.64,8.64 44.43,7.86 71.6,7.86 | 71.6,7.86 74.14,7.86 | 74.14,7.86 77.95,7.86 | v73.89,6.59 73.89,7.6 74.14,7.86 | v71.35,6.59 71.35,7.6 71.6,7.86
  Top 0.508: 77.95,7.86 v79.99,9.89 v87.35,9.89 | JP7.10 95.87,8.75 94.46,7.35 91.42,7.35 v91.36,7.3
  Bottom 0.406: v91.36,7.3 90.94,7.72 U$22.6 89.74,7.75 88.77,7.75 88.17,8.36 88.17,8.82 89.23,9.89 R58.2
  Bottom 0.508: R58.2 89.69,10.03 89.69,10.65 90.91,11.87 90.91,17.26 C62.2 | v79.99,9.89 79.99,8.57 C61.2 | 88.17,8.36 88.17,9.07 v87.35,9.89
IO_0  (via drill 0.3)
  Top 0.152: U$1.42 16.71,10.88 17.56,10.03 18.02,10.03 v18.48,9.57 | v24.11,11.25 29.12,11.25 IO_CONN.1
  Bottom 0.152: v18.48,9.57 20,9.57 20.3,9.27 22.13,9.27 v24.11,11.25
IO_1  (via drill 0.3)
  Top 0.152: IO_CONN.2 31.66,11.25 30.06,11.25 29.6,10.79 29.6,10.33 28.99,9.72 26.1,9.72 25.49,10.33 23.96,10.33 23.48,9.85 U$1.28 23.43,9.8 v22.44,8.81 | v17.41,9.42 17.41,9.51 U$1.43
  Bottom 0.152: v22.44,8.81 18.02,8.81 v17.41,9.42
IO_2
  Top 0.152: U$1.27 23.79,9.55 24.27,10.03 25.33,10.03 25.94,9.42 29.83,9.42 IO_CONN.3
IO_3
  Top 0.152: U$1.26 24.57,9.57 25.18,9.57 25.64,9.12 32.06,9.12 IO_CONN.4
IO_4
  Top 0.152: U$1.25 29.62,8.79 IO_CONN.5
IO_5  (via drill 0.3)
  Top 0.152: U$1.14 20.96,3.13 21.37,2.71 21.68,2.71 v21.98,2.41
  Bottom 0.152: IO_CONN.6 33.22,7.4 32.04,6.22 32.04,2.1 31.28,1.34 23.05,1.19 22.9,1.19 22.29,1.8 22.29,2.1 v21.98,2.41
IO_6  (via drill 0.3)
  Top 0.152: U$1.13 20.6,2.72 21.52,1.8 22.9,1.8 v23.2,2.1
  Bottom 0.152: IO_CONN.7 31.09,5.19 31.73,4.54 31.73,2.26 31.12,1.65 23.81,1.65 v23.2,2.1
IO_7  (via drill 0.3)
  Top 0.152: U$3.13 20.6,18.72 21.52,17.8 22.9,17.8 v23.2,18.1
  Bottom 0.152: IO_CONN1.7 31.09,21.19 31.73,20.54 31.73,18.26 31.12,17.65 23.81,17.65 v23.2,18.1
IO_8  (via drill 0.3)
  Top 0.152: U$3.14 21.37,18.71 21.68,18.71 v21.98,18.41
  Bottom 0.152: IO_CONN1.6 33.22,23.4 32.04,22.22 32.04,18.1 31.28,17.34 23.05,17.19 22.9,17.19 22.29,17.8 22.29,18.1 v21.98,18.41
IO_9  (via drill 0.3)
  Top 0.152: U$3.42 16.71,26.88 17.56,26.03 18.02,26.03 v18.48,25.57 | v24.11,27.25 29.12,27.25 IO_CONN1.1
  Bottom 0.152: v18.48,25.57 20,25.57 20.3,25.27 22.13,25.27 v24.11,27.25
IO_10
  Top 0.152: U$3.25 29.62,24.79 IO_CONN1.5
IO_11
  Top 0.152: U$3.26 24.57,25.57 25.18,25.57 25.64,25.11 32.06,25.11 IO_CONN1.4
IO_12
  Top 0.152: U$3.27 23.79,25.55 24.27,26.03 25.33,26.03 25.94,25.42 29.83,25.42 IO_CONN1.3
IO_13  (via drill 0.3)
  Top 0.152: IO_CONN1.2 31.66,27.25 30.06,27.25 29.6,26.79 29.6,26.33 28.99,25.72 26.1,25.72 25.49,26.33 23.96,26.33 23.48,25.85 U$3.28 23.43,25.8 v22.44,24.81 | v17.41,25.42 17.41,25.51 U$3.43
  Bottom 0.152: v22.44,24.81 18.02,24.81 v17.41,25.42
IO_14  (via drill 0.3)
  Top 0.152: U$5.13 20.6,34.72 21.52,33.8 22.9,33.8 v23.2,34.1
  Bottom 0.152: IO_CONN2.7 31.09,37.19 31.73,36.54 31.73,34.26 31.12,33.65 23.81,33.65 v23.2,34.1
IO_15  (via drill 0.3)
  Top 0.152: U$5.14 20.96,35.13 21.37,34.71 21.68,34.71 v21.98,34.41
  Bottom 0.152: IO_CONN2.6 33.22,39.4 32.04,38.22 32.04,34.1 31.28,33.34 23.05,33.19 22.9,33.19 22.29,33.8 22.29,34.1 v21.98,34.41
IO_16  (via drill 0.3)
  Top 0.152: U$5.42 16.71,42.88 17.56,42.03 18.02,42.03 v18.48,41.57 | v24.11,43.25 29.12,43.25 IO_CONN2.1
  Bottom 0.152: v18.48,41.57 20,41.57 20.3,41.27 22.13,41.27 v24.11,43.25
IO_17
  Top 0.152: U$5.25 29.62,40.79 IO_CONN2.5
IO_18
  Top 0.152: U$5.26 24.57,41.57 25.18,41.57 25.64,41.12 32.06,41.12 IO_CONN2.4
IO_19
  Top 0.152: U$5.27 23.79,41.55 24.27,42.03 25.33,42.03 25.94,41.42 29.83,41.42 IO_CONN2.3
IO_20  (via drill 0.3)
  Top 0.152: IO_CONN2.2 31.66,43.25 30.06,43.25 29.6,42.79 29.6,42.33 28.99,41.72 26.1,41.72 25.49,42.33 23.96,42.33 23.48,41.85 U$5.28 23.43,41.8 v22.44,40.81 | v17.41,41.42 17.41,41.51 U$5.43
  Bottom 0.152: v22.44,40.81 18.02,40.81 v17.41,41.42
IO_21  (via drill 0.3)
  Top 0.152: U$7.13 20.6,50.72 21.52,49.8 22.9,49.8 v23.2,50.1
  Bottom 0.152: IO_CONN3.7 31.09,53.19 31.73,52.54 31.73,50.26 31.12,49.65 23.81,49.65 v23.2,50.1
IO_22  (via drill 0.3)
  Top 0.152: U$7.14 20.96,51.13 21.37,50.71 21.68,50.71 v21.98,50.41
  Bottom 0.152: IO_CONN3.6 33.22,55.4 32.04,54.22 32.04,50.1 31.28,49.34 23.05,49.19 22.9,49.19 22.29,49.8 22.29,50.1 v21.98,50.41
IO_23  (via drill 0.3)
  Top 0.152: U$7.42 16.71,58.88 17.56,58.03 18.02,58.03 v18.48,57.57 | v24.11,59.25 29.12,59.25 IO_CONN3.1
  Bottom 0.152: v18.48,57.57 20,57.57 20.3,57.27 22.13,57.27 v24.11,59.25
IO_24
  Top 0.152: U$7.25 29.62,56.79 IO_CONN3.5
IO_25
  Top 0.152: U$7.26 24.57,57.57 25.18,57.57 25.64,57.12 32.06,57.12 IO_CONN3.4
IO_26
  Top 0.152: U$7.27 23.79,57.55 24.27,58.03 25.33,58.03 25.94,57.42 29.83,57.42 IO_CONN3.3
IO_27  (via drill 0.3)
  Top 0.152: IO_CONN3.2 31.66,59.25 30.06,59.25 29.6,58.79 29.6,58.33 28.99,57.72 26.1,57.72 25.49,58.33 23.96,58.33 23.48,57.85 U$7.28 23.43,57.8 v22.44,56.81 | v17.41,57.42 17.41,57.51 U$7.43
  Bottom 0.152: v22.44,56.81 18.02,56.81 v17.41,57.42
IO_28
  Top 0.152: JP1.1 11.44,95.22 6.03,95.22 5.65,94.84 5.65,90.02 5.78,89.89 5.78,79.48 6.67,78.59 6.67,77.88 T1.B 6.79,77.75
IO_29
  Top 0.152: JP2.1 35.44,95.22 30.03,95.22 29.65,94.84 29.65,90.02 29.78,89.89 29.78,79.48 30.67,78.59 30.67,77.88 T2.B 30.79,77.75
IO_30
  Top 0.152: JP3.1 59.44,95.22 54.03,95.22 53.65,94.84 53.65,90.02 53.78,89.89 53.78,79.48 54.67,78.59 54.67,77.88 T3.B 54.79,77.75
IO_31
  Top 0.152: JP4.1 83.44,95.22 78.03,95.22 77.65,94.84 77.65,90.02 77.78,89.89 77.78,79.48 78.67,78.59 78.67,77.88 T4.B 78.79,77.75
IO_32
  Top 0.152: JP5.1 92.58,59.4 92.18,59.79 79.73,59.79 77.7,61.83 PAD13.1
IO_33
  Top 0.152: JP5.3 78.06,56.86 77.7,56.75 PAD15.1
IO_34
  Top 0.152: PAD17.1 89.38,51.67 91.92,54.21 93.22,54.21 JP5.5
IO_35
  Top 0.152: PAD19.1 88.14,46.59 JP5.7
  Bottom 0.152: R53.2 90.56,60.21 91.67,61.32 93.45,61.32 94.72,60.05 94.72,53.16 JP5.7
IO_36
  Top 0.152: JP5.2 95.59,59.4 94.21,58.02 92.69,58.02 91.42,59.29 PAD14.1
IO_37
  Top 0.152: JP5.4 95.87,56.12 95.23,55.48 92.94,55.48 92.18,56.24 79.73,56.24 77.7,54.21 PAD16.1
IO_38
  Top 0.152: JP5.6 95.84,54.32 94.46,52.94 91.42,52.94 89.64,51.16 79.73,51.16 77.7,49.38 PAD18.1
IO_39
  Top 0.152: JP6.1 92.58,39.4 92.18,39.79 79.73,39.79 77.7,41.83 PAD20.1
IO_40
  Top 0.152: JP6.3 78.06,36.86 77.7,36.75 PAD22.1
IO_41
  Top 0.152: PAD24.1 89.38,31.67 91.92,34.21 93.22,34.21 JP6.5
IO_42
  Top 0.152: PAD26.1 88.14,26.59 JP6.7
  Bottom 0.152: R55.2 90.56,40.21 91.67,41.32 93.45,41.32 94.72,40.05 94.72,33.16 JP6.7
IO_43
  Top 0.152: JP6.2 95.59,39.4 94.21,38.02 92.69,38.02 91.42,39.29 PAD21.1
IO_44
  Top 0.152: JP6.4 95.87,36.12 95.23,35.48 92.94,35.48 92.18,36.24 79.73,36.24 77.7,34.21 PAD23.1
IO_45
  Top 0.152: JP6.6 95.84,34.32 94.46,32.94 91.42,32.94 89.64,31.16 79.73,31.16 77.7,29.38 PAD25.1
IO_46
  Top 0.152: JP7.1 92.58,19.4 92.18,19.79 79.73,19.79 77.7,21.83 PAD27.1
IO_47
  Top 0.152: JP7.3 78.06,16.86 77.7,16.75 PAD29.1
IO_48
  Top 0.152: PAD31.1 89.38,11.67 91.92,14.21 93.22,14.21 JP7.5
IO_49
  Top 0.152: PAD33.1 88.14,6.59 JP7.7
  Bottom 0.152: R57.2 90.56,20.21 91.67,21.32 93.45,21.32 94.72,20.05 94.72,13.16 JP7.7
IO_50
  Top 0.152: JP7.2 95.59,19.4 94.21,18.02 92.69,18.02 91.42,19.29 PAD28.1
IO_51
  Top 0.152: JP7.4 95.87,16.12 95.23,15.48 92.94,15.48 92.18,16.24 79.73,16.24 77.7,14.21 PAD30.1
IO_52
  Top 0.152: JP7.6 95.84,14.32 94.46,12.94 91.42,12.94 89.64,11.16 79.73,11.16 77.7,9.38 PAD32.1
IO_ID
  Top 0.152: U$1.19 22.69,4.9 21.98,5.61 21.83,5.61 21.22,6.22 21.22,7.29 21.68,7.74 25.03,7.74 25.79,6.98 26.25,6.98 26.71,6.52 28.23,6.52 28.38,6.68 28.38,7.32 R2.1 29.23,7.36 30.21,6.37 32.04,6.37 IO_CONN.8
IO_ID1
  Top 0.152: U$3.19 22.69,20.9 21.98,21.61 21.83,21.61 21.22,22.22 21.22,23.29 21.68,23.74 25.03,23.74 25.79,22.98 26.25,22.98 26.71,22.52 28.23,22.52 28.38,22.68 28.38,23.32 R8.1 29.23,23.36 30.21,22.37 32.04,22.37 IO_CONN1.8
IO_ID2
  Top 0.152: U$5.19 22.69,36.9 21.98,37.61 21.83,37.61 21.22,38.22 21.22,39.29 21.68,39.74 25.03,39.74 25.79,38.98 26.25,38.98 26.71,38.52 28.23,38.52 28.38,38.68 28.38,39.32 R14.1 29.23,39.36 30.21,38.37 32.04,38.37 IO_CONN2.8
IO_ID3
  Top 0.152: U$7.19 22.69,52.9 21.98,53.61 21.83,53.61 21.22,54.22 21.22,55.29 21.68,55.74 25.03,55.74 25.79,54.98 26.25,54.98 26.71,54.52 28.23,54.52 28.38,54.68 28.38,55.32 R20.1 29.23,55.36 30.21,54.37 32.04,54.37 IO_CONN3.8
IO_ID4
  Bottom 0.406: R30.1 21.98,92.57 20.58,93.97 20.58,96.24 JP1.8
IO_ID5
  Bottom 0.406: R37.1 45.98,92.57 44.58,93.97 44.58,96.24 JP2.8
IO_ID6
  Bottom 0.406: R44.1 69.98,92.57 68.58,93.97 68.58,96.24 JP3.8
IO_ID7
  Bottom 0.406: R51.1 93.98,92.57 92.58,93.97 92.58,96.24 JP4.8
IO_ID8
  Bottom 0.152: R54.1 91.92,49.89 92.43,50.4 94.49,50.4 JP5.8
IO_ID9
  Bottom 0.152: R56.1 91.92,29.89 92.43,30.4 94.49,30.4 JP6.8
IO_ID10
  Bottom 0.152: R58.1 91.92,9.89 92.43,10.4 94.49,10.4 JP7.8
IO_ID_ENABLE
  Top 0.152: R2.2 25.87,7.36 25.18,8.05 21.52,8.05 20.91,7.44 20.91,6.01 U$1.18
IO_ID_ENABLE1
  Top 0.152: R8.2 25.87,23.36 25.18,24.05 21.52,24.05 20.91,23.44 20.91,22.01 U$3.18
IO_ID_ENABLE2
  Top 0.152: R14.2 25.87,39.36 25.18,40.05 21.52,40.05 20.91,39.44 20.91,38.01 U$5.18
IO_ID_ENABLE3
  Top 0.152: R20.2 25.87,55.36 25.18,56.05 21.52,56.05 20.91,55.44 20.91,54.01 U$7.18
ISP_ENABLE  (via drill 0.3)
  Top 0.152: U$1.44 16.65,9.57 16.65,9.27 v17.56,8.35 | R1.1 26.82,13.47 UART.P$4
  Bottom 0.152: v17.56,8.35 21.98,8.35 22.29,8.05 24.72,8.05 26.86,10.18 26.86,13.51 UART.P$4
ISP_ENABLE1  (via drill 0.3)
  Top 0.152: U$3.44 16.65,25.57 16.65,25.27 v17.56,24.35 | R3.1 26.82,29.47 UART1.P$4
  Bottom 0.152: v17.56,24.35 21.98,24.35 22.29,24.05 24.72,24.05 26.86,26.18 26.86,29.51 UART1.P$4
ISP_ENABLE2  (via drill 0.3)
  Top 0.152: U$5.44 16.65,41.57 16.65,41.27 v17.56,40.35 | R13.1 26.82,45.47 UART2.P$4
  Bottom 0.152: v17.56,40.35 21.98,40.35 22.29,40.05 24.72,40.05 26.86,42.18 26.86,45.51 UART2.P$4
ISP_ENABLE3  (via drill 0.3)
  Top 0.152: U$7.44 16.65,57.57 16.65,57.27 v17.56,56.35 | R19.1 26.82,61.47 UART3.P$4
  Bottom 0.152: v17.56,56.35 21.98,56.35 22.29,56.05 24.72,56.05 26.86,58.18 26.86,61.51 UART3.P$4
LED_G
  Top 0.152: U$1.16 21.61,3.84 20.91,4.54 20.61,4.54 19.85,3.78 19.85,1.5 19.54,1.19 12.8,1.19 R4.1
LED_G1
  Top 0.152: U$3.16 21.61,19.84 20.91,20.54 20.61,20.54 19.85,19.78 19.85,17.5 19.54,17.19 12.8,17.19 R9.1
LED_G2
  Top 0.152: U$5.16 21.61,35.84 20.91,36.54 20.61,36.54 19.85,35.78 19.85,33.49 19.54,33.19 12.8,33.19 R15.1
LED_G3
  Top 0.152: U$7.16 21.61,51.84 20.91,52.54 20.61,52.54 19.85,51.78 19.85,49.49 19.54,49.19 12.8,49.19 R21.1
LED_R
  Top 0.152: U$1.17 21.22,5 20.46,5 19.54,4.09 19.54,1.8 19.24,1.5 13.64,1.5 13.45,1.69 13.45,2.26 13.07,2.64 R5.1
LED_R1
  Top 0.152: U$3.17 21.22,21 20.46,21 19.54,20.09 19.54,17.8 19.24,17.5 13.64,17.5 13.45,17.69 13.45,18.26 13.07,18.64 R10.1
LED_R2
  Top 0.152: U$5.17 21.22,37 20.46,37 19.54,36.09 19.54,33.8 19.24,33.49 13.64,33.49 13.45,33.69 13.45,34.26 13.07,34.64 R16.1
LED_R3
  Top 0.152: U$7.17 21.22,53 20.46,53 19.54,52.09 19.54,49.8 19.24,49.49 13.64,49.49 13.45,49.69 13.45,50.26 13.07,50.64 R22.1
LIVE
  Bottom 1.016: PAD1.1 15.21,66.37 R25.1 12.5,66.5 U$10.P$7
LIVE1
  Bottom 1.016: PAD4.1 39.21,66.37 R32.1 36.5,66.5 U$12.P$7
LIVE2
  Bottom 1.016: PAD7.1 63.21,66.37 R39.1 60.5,66.5 U$14.P$7
LIVE3
  Bottom 1.016: PAD10.1 87.21,66.37 R46.1 84.5,66.5 U$16.P$7
N$1
  Top 0.152: LED_R.1 11.17,2.77 R5.2
N$2
  Top 0.152: LED_G.1 11.15,1.6 R4.2
N$3
  Top 0.152: C8.2 6.97,6.84 U$2.P$4 8.04,8.81 11.31,8.81 11.47,8.66 11.47,6.68 11.92,6.22 12.07,6.22 13.14,5.15 14.51,5.15 15.3,5.94 U$1.3
N$4
  Top 0.254: RF_CONN.1 1.76,2.77 2.93,3.93 5.22,3.93 5.98,4.7 6.45,4.7 R7.2 R6.2
N$5
  Top 0.152: U$2.P$1 10.17,5.93 C7.2 12.14,5.7 12.99,4.85 14.89,4.85 U$1.4
N$6
  Top 0.152: 20.43,13.94 20.94,14.45 | 20.43,13.94 20.43,14.32 | 20.43,13.94 20.81,13.94
N$7
  Top 0.152: 22.46,13.94 21.96,14.45 | 22.46,13.94 22.46,14.32 | 22.46,13.94 22.08,13.94
N$8
  Top 0.152: LED_R1.1 11.17,18.77 R10.2
N$9
  Top 0.152: LED_G1.1 11.15,17.6 R9.2
N$10
  Top 0.254: RF_CONN1.1 1.76,18.77 2.93,19.93 5.22,19.93 5.98,20.7 6.45,20.7 R12.2 R11.2
N$11
  Top 0.152: C13.2 6.97,22.84 U$4.P$4 8.04,24.81 11.31,24.81 11.47,24.66 11.47,22.68 11.92,22.22 12.07,22.22 13.14,21.15 14.51,21.15 15.3,21.94 U$3.3
N$12
  Top 0.152: U$4.P$1 10.17,21.93 C12.2 12.14,21.7 12.99,20.85 14.89,20.85 U$3.4
N$13
  Top 0.152: 20.43,29.94 20.94,30.45 | 20.43,29.94 20.43,30.32 | 20.43,29.94 20.81,29.94
N$14
  Top 0.152: 22.46,29.94 21.96,30.45 | 22.46,29.94 22.46,30.32 | 22.46,29.94 22.08,29.94
N$15
  Top 0.152: LED_R2.1 11.17,34.77 R16.2
N$16
  Top 0.152: LED_G2.1 11.15,33.6 R15.2
N$17
  Top 0.254: RF_CONN2.1 1.76,34.77 2.93,35.93 5.22,35.93 5.98,36.7 6.45,36.7 R18.2 R17.2
N$18
  Top 0.152: C20.2 6.97,38.84 U$6.P$4 8.04,40.81 11.31,40.81 11.47,40.66 11.47,38.68 11.92,38.22 12.07,38.22 13.14,37.15 14.51,37.15 15.3,37.94 U$5.3
N$19
  Top 0.152: U$6.P$1 10.17,37.93 C19.2 12.14,37.7 12.99,36.85 14.89,36.85 U$5.4
N$20
  Top 0.152: 20.43,45.94 20.94,46.45 | 20.43,45.94 20.43,46.32 | 20.43,45.94 20.81,45.94
N$21
  Top 0.152: 22.46,45.94 21.96,46.45 | 22.46,45.94 22.46,46.32 | 22.46,45.94 22.08,45.94
N$22
  Top 0.152: LED_R3.1 11.17,50.77 R22.2
N$23
  Top 0.152: LED_G3.1 11.15,49.6 R21.2
N$24
  Top 0.254: RF_CONN3.1 1.76,50.77 2.93,51.93 5.22,51.93 5.98,52.7 6.45,52.7 R24.2 R23.2
N$25
  Top 0.152: C27.2 6.97,54.84 U$8.P$4 8.04,56.81 11.31,56.81 11.47,56.66 11.47,54.68 11.92,54.22 12.07,54.22 13.14,53.15 14.51,53.15 15.3,53.94 U$7.3
N$26
  Top 0.152: U$8.P$1 10.17,53.93 C26.2 12.14,53.7 12.99,52.85 14.89,52.85 U$7.4
N$27
  Top 0.152: 20.43,61.94 20.94,62.45 | 20.43,61.94 20.43,62.32 | 20.43,61.94 20.81,61.94
N$28
  Top 0.152: 22.46,61.94 21.96,62.45 | 22.46,61.94 22.46,62.32 | 22.46,61.94 22.08,61.94
N$29
  Bottom 0.508: R25.2 15.08,70.33 D1.A
N$30
  Bottom 0.508: L1.P$1 15.86,75.01 D1.C 18.1,74.32 C29.+
N$31
  Bottom 0.508: L1.P$2 14.94,81.66 17.46,84.17 19.15,84.17 C30.+ 15.75,87.65 U$9.7
N$32
  Bottom 0.508: 3.77,89.51 C45.1 | C45.1 3.66,91.21 D6.C | U$9.5 6.79,88.75 6.03,89.51 3.68,89.51 C45.1
N$33  (via drill 0.41)
  Top 0.508: v12.89,90.4 13.02,90.4 13.02,88.19 R28.2
  Bottom 0.508: U$9.6 8.06,90.02 9.33,91.29 12.13,91.29 v12.89,90.4
N$34  (via drill 0.41)
  Top 0.508: D5.C 13.52,80.17 13.52,84.77 R28.1 13.02,85.31 13.27,85.06 | 13.27,85.06 13.14,85.06 | 13.27,85.06 v14.29,85.06
  Bottom 0.406: 8.04,82.43 8.04,84.19 7.81,84.43 6.67,84.43 4.38,86.72 3.67,86.72 C45.2
  Bottom 0.508: L2.P$2 9.07,79.46 C31.2 8.78,80.06 R26.1 8.04,82.43 U$9.3 U$9.2 U$9.1 10.6,83.03 12.63,85.06 v14.29,85.06
N$35
  Bottom 0.508: D4.C 4.16,83.22 R27.1
N$36
  Bottom 0.508: 6.75,82.4 R26.2 6.75,80.09 C31.1 | 6.75,82.4 U$9.4 | 6.75,82.4 6.43,82.4 R27.2
N$37
  Bottom 1.016: PAD3.1 2.19,69.06 6.54,69.06 7.05,68.55 7.05,66.14 U$10.P$6
N$38
  Top 0.152: R31.1 8.44,74.79 8.44,73.64 U$10.P$2
N$39
  Top 0.152: T1.C 4.64,74.25 4.64,72.61 U$10.P$4 U$10.P$3
N$40
  Bottom 0.508: R32.2 39.08,70.33 D8.A
N$41
  Bottom 0.508: L3.P$1 39.86,75.01 D8.C 42.1,74.32 C35.+
N$42
  Bottom 0.508: L3.P$2 38.94,81.66 41.46,84.17 43.15,84.17 C36.+ 39.75,87.65 U$11.7
N$43
  Bottom 0.508: 27.77,89.51 C40.1 | C40.1 27.66,91.21 D3.C | U$11.5 30.79,88.75 30.03,89.51 27.68,89.51 C40.1
N$44  (via drill 0.41)
  Top 0.508: v36.89,90.4 37.02,90.4 37.02,88.19 R35.2
  Bottom 0.508: U$11.6 32.06,90.02 33.33,91.29 36.13,91.29 v36.89,90.4
N$45  (via drill 0.41)
  Top 0.508: D7.C 37.52,80.17 37.52,84.77 R35.1 37.02,85.31 37.27,85.06 | 37.27,85.06 37.14,85.06 | 37.27,85.06 v38.29,85.06
  Bottom 0.406: 32.05,82.43 32.05,84.19 31.81,84.43 30.67,84.43 28.38,86.72 27.67,86.72 C40.2
  Bottom 0.508: L4.P$2 33.07,79.46 C37.2 32.78,80.06 R33.1 32.05,82.43 U$11.3 U$11.2 U$11.1 34.6,83.03 36.63,85.06 v38.29,85.06
N$46
  Bottom 0.508: D2.C 28.16,83.22 R34.1
N$47
  Bottom 0.508: 30.75,82.4 R33.2 30.75,80.09 C37.1 | 30.75,82.4 U$11.4 | 30.75,82.4 30.43,82.4 R34.2
N$48
  Bottom 1.016: PAD6.1 26.19,69.06 30.54,69.06 31.05,68.55 31.05,66.14 U$12.P$6
N$49
  Top 0.152: R38.1 32.44,74.79 32.44,73.64 U$12.P$2
N$50
  Top 0.152: T2.C 28.64,74.25 28.64,72.61 U$12.P$4 U$12.P$3
N$51
  Bottom 0.508: R39.2 63.08,70.33 D12.A
N$52
  Bottom 0.508: L5.P$1 63.86,75.01 D12.C 66.1,74.32 C42.+
N$53
  Bottom 0.508: L5.P$2 62.94,81.66 65.46,84.17 67.15,84.17 C43.+ 63.75,87.65 U$13.7
N$54
  Bottom 0.508: 51.77,89.51 C48.1 | C48.1 51.66,91.21 D10.C | U$13.5 54.79,88.75 54.03,89.51 51.68,89.51 C48.1
N$55  (via drill 0.41)
  Top 0.508: v60.89,90.4 61.02,90.4 61.02,88.19 R42.2
  Bottom 0.508: U$13.6 56.06,90.02 57.33,91.29 60.13,91.29 v60.89,90.4
N$56  (via drill 0.41)
  Top 0.508: D11.C 61.52,80.17 61.52,84.77 R42.1 61.02,85.31 61.27,85.06 | 61.27,85.06 61.14,85.06 | 61.27,85.06 v62.29,85.06